# Altium PCB project.pcbdoc
Units mil, origin at the board's own origin, x right, y up, seen from the top; angles counter-clockwise.
Board outline 4860 x 2850 mil, 2 copper layers (Top Layer, Bottom Layer); 18 components, 12 nets, 42 pads, 2 vias.
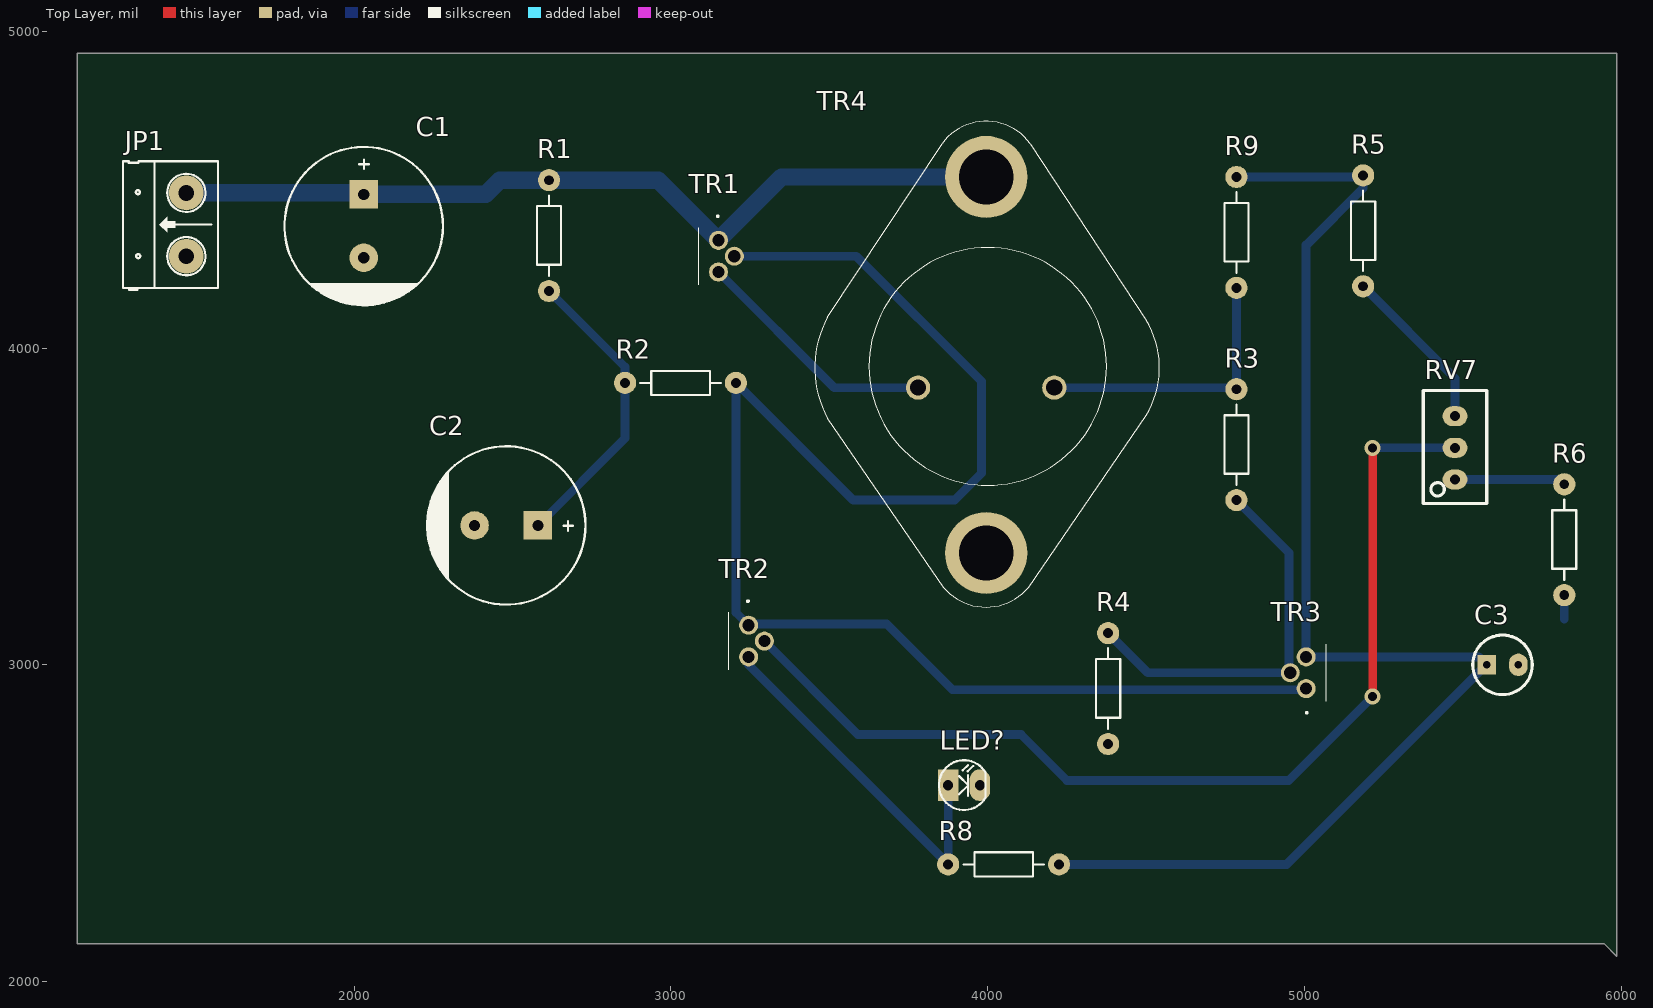
[diagram p0: Top Layer view]
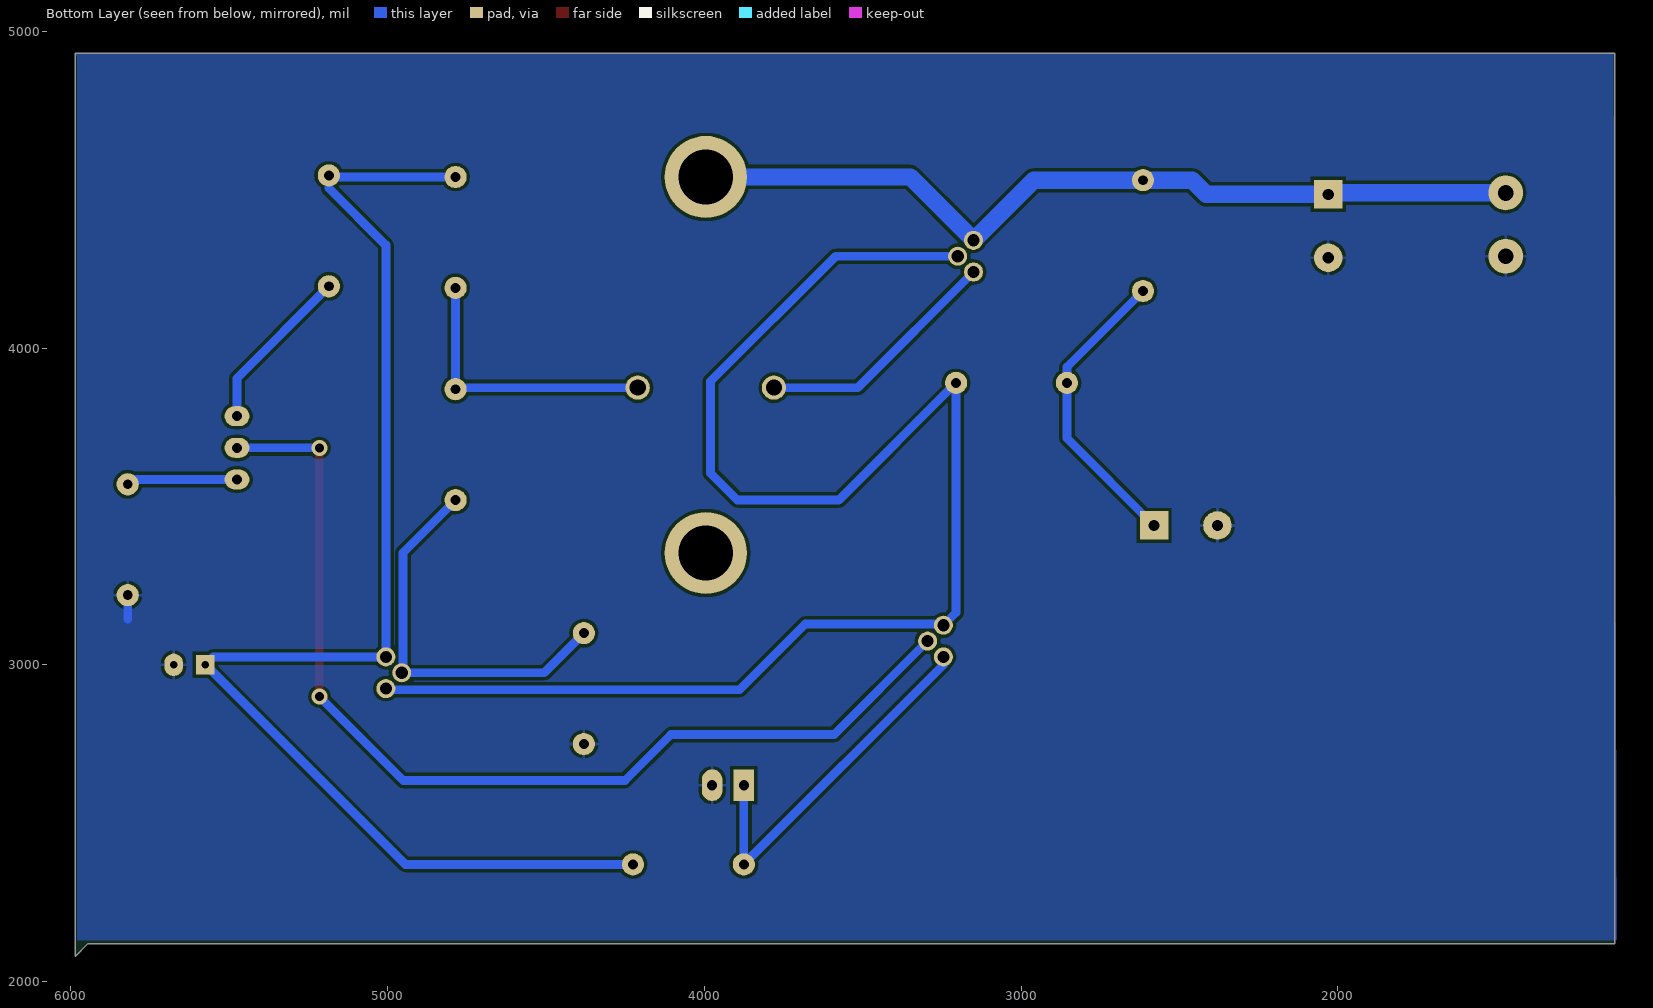
[diagram p1: Bottom Layer view, seen from below]
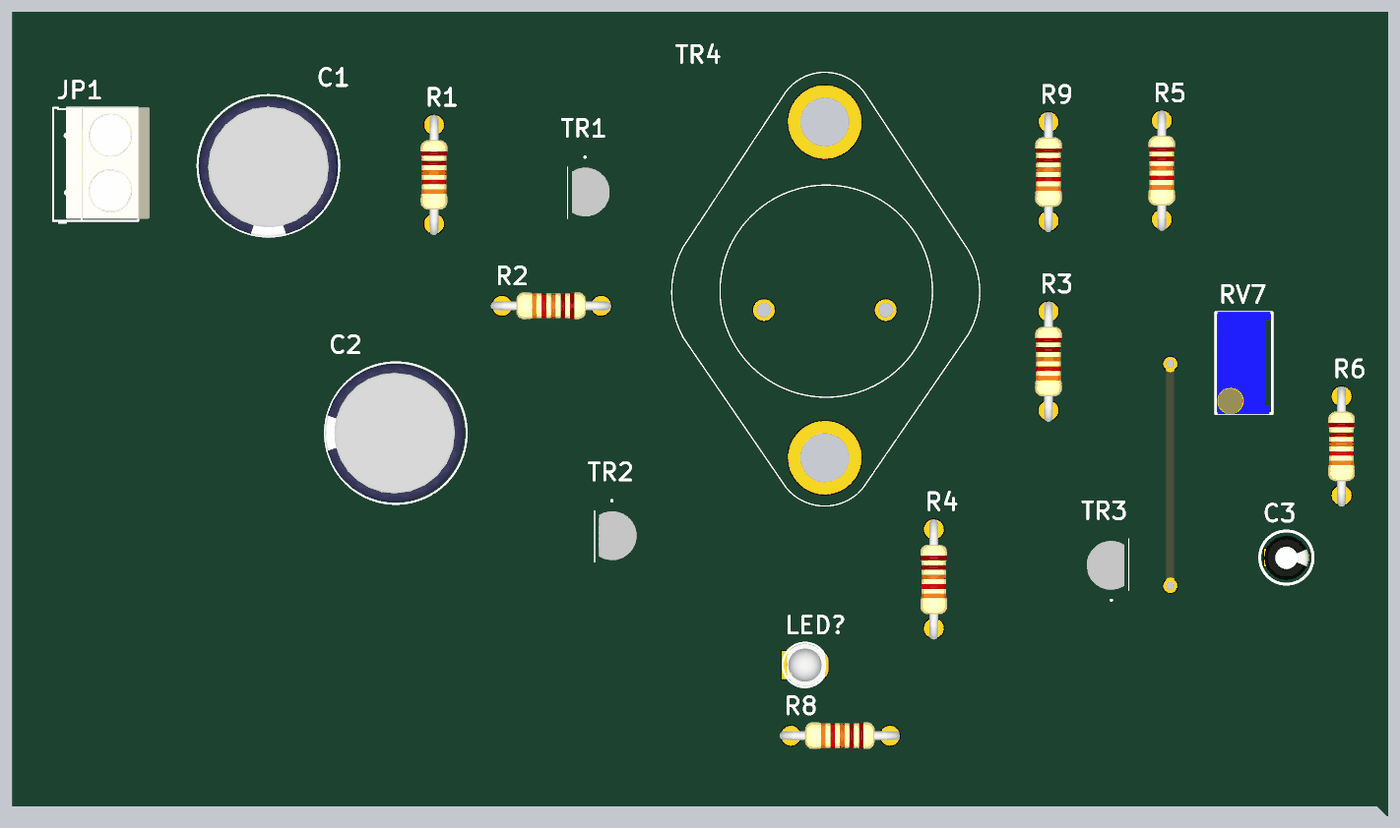
[diagram p2: 3D render of the assembled board from above, using the file's embedded part models]

## Layer stack, top to bottom
Top Solder: solder mask 0.4, Solder Resist, Dk 3.5
Top Layer: signal copper 1.4
Dielectric 1: dielectric 12.6, FR-4, Dk 4.8
Bottom Layer: signal copper 1.4
Bottom Solder: solder mask 0.4, Solder Resist, Dk 3.5

## Board outline
1125,4930 5985,4930 5985,2080 5945,2120 1125,2120

## Design rules (kind name [scope] priority, off if disabled: settings)
Clearance Clearance_1 [InNamedPolygon('Bottom Layer-No Net 1')] p1: gap=10 ignorepadtopadclearanceinfootprint=FALSE except(0: Arc-Hole Track-Hole SMDPad-Hole THPad-Hole Via-Hole Fill-Hole Poly-Hole Region-Hole Text-Hole)
Clearance [All] p2: gap=7.87 ignorepadtopadclearanceinfootprint=FALSE
PolygonConnect [All] p1: connectstyle=Relief reliefconductorwidth=10 reliefentries=4 polygonreliefangle="90 Angle" airgapwidth=10
RoutingVias [All] p1: holewidth=28 width=50 viastyle="Through Hole" minholewidth=28 minwidth=50 maxholewidth=28 maxwidth=50
SolderMaskExpansion [All] p1: expansion=4
Width [All] p1: maxlimit=55.12 minlimit=27.56 preferedwidth=27.56
30 further rules are at their usual default settings.

## Components (designator, comment, footprint, x,y, rotation, side; value= is the part's Value field where it differs from the comment)
C1 "" CP2/5 2030,4485 r270 top value=4700uF/25V
C2 "Cap Pol3" CP2/5 2580,3440 r180 top value=100pF/25V
C3 "Cap Pol 3mm" C3MM 5625,3000 r0 top
JP1 "Header 2_1" HED2 1470,4290 r90 top value="Header 2"
LED? "LED" LED-3 3875,2620 r0 top value="LED 3 ly Single Colour"
R1 "1k2" R1/4W 2615,4180 r90 top value="R1/4W - 1K"
R2 "200" R1/4W 2855,3890 r0 top value="R1/4W - 1K"
R3 "22" R1/4W 4785,3520 r90 top value="R1/4W - 1K"
R4 "1k" R1/4W 4380,2750 r90 top value="R1/4W - 1K"
R5 "1k8" R1/4W 5185,4195 r90 top value="R1/4W - 1K"
R6 "270" R1/4W 5820,3220 r90 top value="R1/4W - 1K"
R8 "680" R1/4W 3875,2370 r0 top value="R1/4W - 1K"
R9 "0R27" R1/4W 4785,4190 r90 top value="R1/4W - 1K"
RV7 "200" RVAR10K 5475,3685 r90 top
TR1 "2SC2328A" 2N2222A 3150,4340 r270 top
TR2 "2N2222A" 2N2222A 3245,3125 r270 top
TR3 "2N2222A" 2N2222A 5005,2925 r90 top
TR4 "2N3055AG" TO-204 3780,3875 r270 top

## Footprints (in the part's own frame and the unit in brackets; to place one, negate y for a bottom-side part, rotate by r counter-clockwise, add the part's x,y. Pads: shape width x height; smd on the part's side, far side on the other; paste and mask are expansions set on the pad)
2N2222A [mil]
  round 60.08 hole 38.62: 1(0,0) 2(50,50) 3(100,0)
  silkscreen extent -78,-63 141,0, body extent -39,-48 134,86, height 248
C3MM [mm]
  rect 1.5x1.58 hole 0.6: 1(-1.27,0)
  oval 1.5x1.8 hole 0.6: 2(1.27,0)
  silkscreen extent -2.39,-2.39 2.39,2.39, body extent -2,-2.03 1.99,1.97, height 7.01
CP2/5 [mil] "Tu hoa 1000uF/25V,50V"
  rect 90x90 hole 35: 1(0,0)
  round 90 hole 35: 2(200,0)
  silkscreen extent -150,-250 350,250, body extent -142,-246 350,246, height 984
HED2 [mil] "Header 2, 2 pin, hight 300mil, Pin to Pin 200, Colour Green"
  round 110 hole 50: 1(0,0) 2(200,0)
  silkscreen extent -106,-100 300,200, body extent -92,-140 302,155, height 394
LED-3 [mil] "LED 2 PIN, 3ly Only colour"
  rect 65x100 hole 32: 1(0,0)
  oval 65x100 hole 32: 2(100,0)
  silkscreen extent -29,-78 118,79, body extent -13,-75 125,75, height 217
R1/4W [mil] "R 1/4W, 2 Pin, 350mil"
  round 70 hole 31: 1(0,0) 2(350,0)
  silkscreen extent 48,-38 302,38, body extent -40,-47 386,47, height 111
RVAR10K [mm] "Bien tro vi chinh"
  oval 1.6x2 hole 0.8: 1(-2.54,0) 2(0,0) 3(2.54,0)
  silkscreen extent -4.47,-2.54 4.6,2.54, body extent -4.54,-2.4 4.66,2.4, height 12.02
TO-204 [mm]
  round 1.94 hole 1.29: 1(0,0) 2(0,10.922)
  round 6.59 hole 4.39: 3(-16.891,5.461) 4(13.259,5.461)
  silkscreen extent -21.35,-8.28 17.6,19.36

## Part data
C1: library part "Cap Pol3", "Polarized Capacitor (Surface Mount)", LatestRevisionDate=17-Jul-2002, LatestRevisionNote="Re-released for DXP Platform.", PackageReference=C0805, Publisher="Altium Limited"
C2: "Polarized Capacitor (Surface Mount)", LatestRevisionDate=17-Jul-2002, LatestRevisionNote="Re-released for DXP Platform.", PackageReference=C0805, Publisher="Altium Limited"
C3: "Polarized Capacitor (Axial)", =100uF,25V, LatestRevisionDate=17-Jul-2002, LatestRevisionNote="Re-released for DXP Platform.", PackageReference=POLAR0.8, Published=8-Jun-2000, Publisher="Altium Limited"
JP1: "Header, 2-Pin", Manufacturer="Generic Components", Class=Connector
LED?: "LED Single colour Green and Red"
R1 R2 R3 R4 R5 R6 R8 R9: library part R1/4W, "Resistor 1/4W"
RV7: library part "Variable Resistor", "Variable Resistor", LatestRevisionDate=17-Jul-2002, LatestRevisionNote="Re-released for DXP Platform.", PackageReference=VR5, Published=8-Jun-2000, Publisher="Altium Limited", Set Position=0.5, Sim Note="Enter the Resistance value and the set point into parameter fields."
TR1: library part 2N2222A, "Transistor BJT NPN", Manufacturer_Name="Foshan Blue Rocket Elec", Datasheet Link=https://datasheet.lcsc.com/szlcsc/1901291437_Foshan-Blue-Rocket-Elec-2N2222A_C358533.pdf, Height=4.7mm, Manufacturer_Part_Number=2N2222A
TR2 TR3: "Transistor BJT NPN", Manufacturer_Name="Foshan Blue Rocket Elec", Datasheet Link=https://datasheet.lcsc.com/szlcsc/1901291437_Foshan-Blue-Rocket-Elec-2N2222A_C358533.pdf, Height=4.7mm, Manufacturer_Part_Number=2N2222A
TR4: "Transistor BJT NPN", Manufacturer_Name="ON Semiconductor", Mouser Part Number=863-2N3055AG, Arrow Part Number=2N3055AG, Arrow Price/Stock=https://www.arrow.com/en/products/2n3055ag/on-semiconductor, Datasheet Link=http://www.onsemi.com/pub/Collateral/2N3055A-D.PDF, Manufacturer_Part_Number=2N3055AG, Mouser Price/Stock=https://www.mouser.co.uk/ProductDetail/ON-Semiconductor/2N3055AG?qs=vLkC5FC1VN8e7R5UBGEUlg%3D%3D

## Via types
v1: diameter 50, hole 28, Top Layer to Bottom Layer, 2 vias

## Nets (pads, with @x,y where several pads share a name; then routed paths per layer and width w, separated by ;. In a path a pad name is that pad's centre, name@x,y a point inside that pad or via, vN(x,y) a via of type N, cw(c..) or ccw(c..) an arc to the next point about the centre after c; other vN are vias at no path point)
24V: C1.1 JP1.2 R1.2 TR1.1 TR4.3 | length 2707.3
  Bottom Layer w27.56: C1.1@2025,4490 C1.1
  Bottom Layer w55.12: JP1.2 C1.1@2025,4490 ; C1.1 2415,4485 2460,4530 R1.2 2960,4530 TR1.1 3350,4540 TR4.3
GND: C1.2 C2.2 C3.2 JP1.1 LED?.2 R4.1 R6.1 | length 75
  Bottom Layer w27.56: 5820,3145 R6.1
NetC2_1: C2.1 R1.1 R2.1 | length 953.3
  Bottom Layer w27.56: C2.1 2855,3715 R2.1 2855,3940 R1.1
NetC3_1: C3.1 R5.2 R8.2 R9.2 TR3.3 | length 4187.9
  Bottom Layer w27.56: R8.2 4943.87,2370 5573.87,3000 C3.1 5550,3025 TR3.3 5005,4325 5185,4505 R5.2 5180,4540 R9.2
NetLED?_1: LED?.1 R8.1 TR2.3 | length 1166
  Bottom Layer w27.56: TR2.3 3245,3000 R8.1 LED?.1
NetR2_2: R2.2 TR1.2 TR2.1 TR3.1 | length 4835.5
  Bottom Layer w27.56: TR1.2@3203.82,4286.18 TR1.2 3585,4290 3980,3895 3980,3605 3895,3520 3575,3520 R2.2 3205,3165 TR2.1 3245,3128.82 3681.18,3128.82 3888.82,2921.18 5001.18,2921.18 TR3.1
NetR3_1: R3.1 R4.2 TR3.2 | length 1240.6
  Bottom Layer w27.56: R4.2 4505,2975 TR3.2@4951.18,2975 ; R3.1 4951.18,3353.82 TR3.2@4951.18,2975 ; TR3.2 TR3.2@4951.18,2975
NetR3_2: R3.2 R9.1 TR4.2 | length 897.1
  Bottom Layer w27.56: TR4.2 4780,3875 R3.2 R9.1
NetR5_1: R5.1 RV7.3 | length 530.1
  Bottom Layer w27.56: R5.1 5475,3905 RV7.3
NetR6_2: R6.2 RV7.1 | length 351.2
  Bottom Layer w27.56: RV7.1 5805,3585 R6.2
NetTR1_3: TR1.3 TR4.1 | length 781.2
  Bottom Layer w27.56: TR1.3 3515,3875 TR4.1
VR: RV7.2 TR2.2 | length 3257
  Top Layer w27.56: v1(5215,2900) v1(5215,3685)
  Bottom Layer w27.56: TR2.2 3590,2780 4105,2780 4250,2635 4950,2635 v1(5215,2900) ; v1(5215,3685) RV7.2
pads on no net: TR4.4

## Polygon pours and split planes (outlines as drawn)
GND on Bottom Layer "Bottom Layer-No Net 1" (solid, pour order 4): 1130,4930 5980,4930 5985,4925 5980,4920 5980,2130 1125,2130 1120,2125